# EAGLE board CT_schematic (EAGLE 7.6.0)

Size 100 x 80 mm. Coordinates in mm from the lower left corner, seen from the top.
Outline: 0,0 100,0 100,80 0,80 0,0
Copper layers (1*16): Top 0.035mm / dielectric 1.5mm / Bottom 0.035mm
Design rules "default": minimum track width 10mil, minimum drill 24mil, track to track 8mil, track to pad 8mil, pad to pad 8mil, via to via 8mil, smd to smd 8mil, copper to edge 40mil, drill to drill 8mil, minimum pad ring 10mil, minimum via ring 8mil, stop-mask expansion 4mil, vias tented up to drill 0mil, thermal gap 10mil

## Footprints (pad centres in the part's own frame; a part is rotated, then mirrored left to right if it is on the bottom)
C0603 = smd 0.8 x 0.8: 1 -0.762,0; 2 0.762,0
C0402 = smd 0.5 x 0.5: 1 -0.508,0; 2 0.508,0
C0805 = smd 1.2 x 1.3: 1 -1.016,0; 2 1.016,0
C1210 = smd 1.2 x 2.5: 1 -1.524,0; 2 1.524,0
C1206 = smd 1.3 x 1.6: 1 -1.524,0; 2 1.524,0
L0603 = smd 0.8 x 0.8: 1 -0.762,0; 2 0.762,0
DR1040 = smd 1.6 x 3.2: 1 -4.458,0; 2 4.458,0
L1210 = smd 1.2 x 2.5: 1 -1.524,0; 2 1.524,0
R0603 = smd 0.8 x 0.8: 1 -0.762,0; 2 0.762,0
LQFP144 = smd 0.35 x 1.35: 1 -8.75,-10.625; 2 -8.25,-10.625; 3 -7.75,-10.625; 4 -7.25,-10.625; 5 -6.75,-10.625; 6 -6.25,-10.625; 7 -5.75,-10.625; 8 -5.25,-10.625; 9 -4.75,-10.625; 10 -4.25,-10.625; 11 -3.75,-10.625; 12 -3.25,-10.625; 13 -2.75,-10.62; 14 -2.25,-10.625; 15 -1.75,-10.625; 16 -1.25,-10.625; 17 -0.75,-10.625; 18 -0.25,-10.625; 19 0.25,-10.625; 20 0.75,-10.625; 21 1.25,-10.625; 22 1.75,-10.625; 23 2.25,-10.625; 24 2.75,-10.62; 25 3.25,-10.625; 26 3.75,-10.625; 27 4.25,-10.625; 28 4.75,-10.625; 29 5.25,-10.625; 30 5.75,-10.625; 31 6.25,-10.625; 32 6.75,-10.625; 33 7.25,-10.625; 34 7.75,-10.625; 35 8.25,-10.625; 36 8.75,-10.625; 73 8.75,10.625; 74 8.25,10.625; 75 7.75,10.625; 76 7.25,10.625; 77 6.75,10.625; 78 6.25,10.625; 79 5.75,10.625; 80 5.25,10.625; 81 4.75,10.625; 82 4.25,10.625; 83 3.75,10.625; 84 3.25,10.625; 85 2.75,10.625; 86 2.25,10.625; 87 1.75,10.625; 88 1.25,10.625; 89 0.75,10.625; 90 0.25,10.625; 91 -0.25,10.625; 92 -0.75,10.625; 93 -1.25,10.625; 94 -1.75,10.625; 95 -2.25,10.625; 96 -2.75,10.625; 97 -3.25,10.625; 98 -3.75,10.625; 99 -4.25,10.625; 100 -4.75,10.625; 101 -5.25,10.625; 102 -5.75,10.625; 103 -6.25,10.625; 104 -6.75,10.625; 105 -7.25,10.625; 106 -7.75,10.625; 107 -8.25,10.625; 108 -8.75,10.625 | smd 1.35 x 0.35: 37 10.625,-8.75; 38 10.625,-8.25; 39 10.625,-7.75; 40 10.625,-7.25; 41 10.625,-6.75; 42 10.625,-6.25; 43 10.625,-5.75; 44 10.625,-5.25; 45 10.625,-4.75; 46 10.625,-4.25; 47 10.625,-3.75; 48 10.625,-3.25; 49 10.625,-2.75; 50 10.625,-2.25; 51 10.625,-1.75; 52 10.625,-1.25; 53 10.625,-0.75; 54 10.625,-0.25; 55 10.625,0.25; 56 10.625,0.75; 57 10.625,1.25; 58 10.625,1.75; 59 10.625,2.25; 60 10.625,2.75; 61 10.625,3.25; 62 10.625,3.75; 63 10.625,4.25; 64 10.625,4.75; 65 10.625,5.25; 66 10.625,5.75; 67 10.625,6.25; 68 10.625,6.75; 69 10.625,7.25; 70 10.625,7.75; 71 10.625,8.25; 72 10.625,8.75; 109 -10.625,8.75; 110 -10.625,8.25; 111 -10.625,7.75; 112 -10.625,7.25; 113 -10.625,6.75; 114 -10.625,6.25; 115 -10.625,5.75; 116 -10.625,5.25; 117 -10.625,4.75; 118 -10.625,4.25; 119 -10.625,3.75; 120 -10.625,3.25; 121 -10.625,2.75; 122 -10.625,2.25; 123 -10.625,1.75; 124 -10.625,1.25; 125 -10.625,0.75; 126 -10.625,0.25; 127 -10.625,-0.25; 128 -10.625,-0.75; 129 -10.625,-1.25; 130 -10.625,-1.75; 131 -10.625,-2.25; 132 -10.625,-2.75; 133 -10.625,-3.25; 134 -10.625,-3.75; 135 -10.625,-4.25; 136 -10.625,-4.75; 137 -10.625,-5.25; 138 -10.625,-5.75; 139 -10.625,-6.25; 140 -10.625,-6.75; 141 -10.625,-7.25; 142 -10.625,-7.75; 143 -10.625,-8.25; 144 -10.625,-8.75
10100565 = smd 0.8 x 2.35: 1 0,0; 2 1.25,0; 3 2.55,0; 4 4.25,0; 5 5.43,0; 6 6.68,0; 7 7.93,0; 8 9.18,0; 9 11.67,0; 10 14.18,0; 11 15.43,0; 12 16.68,0; 13 17.93,0; 14 19.18,0; 15 21.68,0 | smd 1.5 x 3.1: 16 23.495,-1.375; 20 25.685,-22.875 | smd 1.55 x 3.1: 17 -1.815,-1.375; 21 -1.815,-22.875 | drill 1.1 pad 1.1: 18 21.68,-2.375; 19 0.68,-2.375
SOIC-8 = smd 1.6 x 0.6: 1 -2.7,1.905 | smd 1.55 x 0.6: 2 -2.7,0.635; 3 -2.7,-0.635; 4 -2.7,-1.905; 5 2.7,-1.905; 6 2.7,-0.635; 7 2.7,0.635; 8 2.7,1.905
182-009-MALE = drill 1.194 pad 1.524 octagon: 1 -5.537,10.923; 2 -2.769,10.923; 3 0,10.923; 4 2.769,10.923; 5 5.537,10.923; 6 -4.153,8.08; 7 -1.384,8.08; 8 1.384,8.08; 9 4.153,8.08 | hole 3.048: -12.446,9.501; 12.446,9.501
SSOP-28 = smd 1.5 x 0.4: 1 -3.625,4.225; 2 -3.625,3.575; 3 -3.625,2.925; 4 -3.625,2.275; 5 -3.625,1.625; 6 -3.625,0.975; 7 -3.625,0.325; 8 -3.625,-0.325; 9 -3.625,-0.975; 10 -3.625,-1.625; 11 -3.625,-2.275; 12 -3.625,-2.925; 13 -3.625,-3.575; 14 -3.625,-4.225; 15 3.625,-4.225; 16 3.625,-3.575; 17 3.625,-2.925; 18 3.625,-2.275; 19 3.625,-1.625; 20 3.625,-0.975; 21 3.625,-0.325; 22 3.625,0.325; 23 3.625,0.975; 24 3.625,1.625; 25 3.625,2.275; 26 3.625,2.925; 27 3.625,3.575; 28 3.625,4.225
TH58NVG3S0HBAI4 = smd 0.46 x 0.46: A1 -5.6,2.4; A2 -5.6,1.6; A9 -5.6,-5.6; A10 -5.6,-6.4; B1 -4.8,2.4; B9 -4.8,-5.6; B10 -4.8,-6.4; C3 -4,0.8; C4 -3.2,0.8; C5 -2.4,0.8; C6 -1.6,0.8; C7 -0.8,0.8; C8 0,0.8; D3 -4,0; D4 -3.2,0; D5 -2.4,0; D6 -1.6,0; D7 -0.8,0; D8 0,0; E3 -4,-0.8; E4 -3.2,-0.8; E5 -2.4,-0.8; E6 -1.6,-0.8; E7 -0.8,-0.8; E8 0,-0.8; F3 -4,-1.6; F4 -3.2,-1.6; F5 -2.4,-1.6; F6 -1.6,-1.6; F7 -0.8,-1.6; F8 0,-1.6; G3 -4,-2.4; G4 -3.2,-2.4; G5 -2.4,-2.4; G6 -1.6,-2.4; G7 -0.8,-2.4; G8 0,-2.4; H3 -4,-3.2; H4 -3.2,-3.2; H5 -2.4,-3.2; H6 -1.6,-3.2; H7 -0.8,-3.2; H8 0,-3.2; J3 -4,-4; J4 -3.2,-4; J5 -2.4,-4; J6 -1.6,-4; J7 -0.8,-4; J8 0,-4; K3 -4,-4.8; K4 -3.2,-4.8; K5 -2.4,-4.8; K6 -1.6,-4.8; K7 -0.8,-4.8; K8 0,-4.8; L1 0.8,2.4; L2 0.8,1.6; L9 0.8,-5.6; L10 0.8,-6.4; M1 1.6,2.4; M2 1.6,1.6; M9 1.6,-5.6; M10 1.6,-6.4
FCI_10118193-0001LF = smd 0.4 x 1.35: 1 -1.3,2.675; 2 -0.65,2.675; 3 0,2.675; 4 0.65,2.675; 5 1.3,2.675 | smd 1.6 x 1.4: 6 -3.2,2.45; 7 3.2,2.45 | smd 1.9 x 1.9: 8 -1.2,0; 9 1.2,0 | hole 0.5: -3.3,0; 3.3,0
SOT143B = smd 1 x 0.7: 1 -0.75,-1 | smd 0.6 x 0.7: 2 0.95,-1; 3 0.95,1; 4 -0.95,1
ABLS-25.000MHZ-B2F-T = smd 5.6 x 2.8: 1 -3.81,0; 2 5.69,0
ASEK = smd 1.4 x 1: 1 -1.1,-0.8; 2 1.1,-0.8; 3 1.1,0.8; 4 -1.1,0.8
TSOT-23-5 = smd 1.3 x 0.62: 1 -1.31,0.95; 2 -1.31,0; 3 -1.31,-0.95; 4 1.31,-0.95; 5 1.31,0.95
DFN-8_DDB = smd 0.805 x 0.3: 1 -0.952,0.75; 2 -0.952,0.25; 3 -0.952,-0.25; 4 -0.952,-0.75; 5 0.952,-0.75; 6 0.952,-0.25; 7 0.952,0.25; 8 0.952,0.75 | smd 0.61 x 2.2: 9 0,0
DFN8_2X3MC = smd 0.813 x 0.305: 1 -1.398,0.75; 2 -1.398,0.25; 3 -1.398,-0.25; 4 -1.398,-0.75; 5 1.398,-0.75; 6 1.398,-0.25; 7 1.398,0.25; 8 1.398,0.75 | smd 1.753 x 1.549: 9 0,0
JST-2-SMD = smd 1 x 4.6: 1 -1,-3.7; 2 1,-3.7 | smd 1.6 x 3.4: NC1 -3.4,1.5; NC2 3.4,1.5
SON-6 = smd 0.55 x 0.3: 1 -0.355,0.5 | smd 0.52 x 0.3: 2 -0.37,0; 3 -0.37,-0.5; 4 0.37,-0.5; 5 0.37,0; 6 0.37,0.5
SW_4-1437565-2 = smd 1.4 x 2.1: 1 -2.23,4.55; 2 -2.23,-4.55; 3 2.23,4.55; 4 2.23,-4.55
LGM67K-G1J2-24-Z = smd 0.8 x 1.4: A -2,0; C 0,0
NC7SZ125M5X = smd 1.3 x 0.7: 1 -1.3,0.95; 2 -1.3,0; 3 -1.3,-0.95; 4 1.3,-0.95; 5 1.3,0.95

## Placement (x,y rotation side)
C1  1e-06  [C0603]  -78.74,90.17 0 top  (outside the outline)
C2  1e-07  [C0603]  -82.55,90.17 0 top  (outside the outline)
C3  1e-07  [C0603]  -86.36,90.17 0 top  (outside the outline)
C4  1e-07  [C0603]  -90.17,90.17 0 top  (outside the outline)
C5  1e-07  [C0603]  -15.24,95.25 0 top  (outside the outline)
C6  1e-07  [C0603]  -19.05,95.25 0 top  (outside the outline)
C7  1e-07  [C0603]  -22.86,95.25 0 top  (outside the outline)
C8  1e-07  [C0603]  -26.67,95.25 0 top  (outside the outline)
C9  1e-07  [C0603]  -30.48,95.25 0 top  (outside the outline)
C10  1e-07  [C0603]  -34.29,95.25 0 top  (outside the outline)
C11  1e-07  [C0603]  -38.1,95.25 0 top  (outside the outline)
C12  1e-07  [C0603]  -41.91,95.25 0 top  (outside the outline)
C13  1e-07  [C0603]  -45.72,95.25 0 top  (outside the outline)
C14  4.7e-06  [C0603]  -59.69,90.17 0 top  (outside the outline)
C15  2.2e-06  [C0603]  -63.5,90.17 0 top  (outside the outline)
C16  2.2e-06  [C0603]  -67.31,90.17 0 top  (outside the outline)
C17  1e-08  [C0603]  -49.53,95.25 0 top  (outside the outline)
C18  1e-06  [C0603]  -53.34,95.25 0 top  (outside the outline)
C19  1e-11  [C0402]  -91.44,95.25 0 top  (outside the outline)
C20  1e-11  [C0402]  -15.24,100.33 0 top  (outside the outline)
C21  1e-06  [C0603]  -57.15,95.25 0 top  (outside the outline)
C22  1e-07  [C0402]  -19.05,100.33 0 top  (outside the outline)
C23  1e-05  [C0805]  -46.99,80.01 0 top  (outside the outline)
C24  1e-06  [C0603]  -60.96,95.25 0 top  (outside the outline)
C25  1e-06  [C0603]  -64.77,95.25 0 top  (outside the outline)
C26  1e-07  [C0402]  -22.86,100.33 0 top  (outside the outline)
C27  1e-07  [C0402]  -26.67,100.33 0 top  (outside the outline)
C28  1e-07  [C0402]  -30.48,100.33 0 top  (outside the outline)
C29  1e-07  [C0402]  -34.29,100.33 0 top  (outside the outline)
C30  1e-07  [C0402]  -38.1,100.33 0 top  (outside the outline)
C31  1e-05  [C0805]  -52.07,80.01 0 top  (outside the outline)
C32  1e-07  [C0402]  -41.91,100.33 0 top  (outside the outline)
C33  1e-07  [C0402]  -45.72,100.33 0 top  (outside the outline)
C34  1e-08  [C0402]  -49.53,100.33 0 top  (outside the outline)
C35  1e-05  [C0805]  -57.15,80.01 0 top  (outside the outline)
C36  1e-05  [C0805]  -62.23,80.01 0 top  (outside the outline)
C37  1e-05  [C1210]  -16.51,80.01 0 top  (outside the outline)
C38  2.2e-06  [C0603]  -71.12,90.17 0 top  (outside the outline)
C39  2.2e-07  [C0603]  -74.93,90.17 0 top  (outside the outline)
C40  1e-07  [C0402]  -53.34,100.33 0 top  (outside the outline)
C41  1e-05  [C1206]  -29.21,80.01 0 top  (outside the outline)
C42  1e-05  [C1206]  -35.56,80.01 0 top  (outside the outline)
C43  1e-08  [C0402]  -57.15,100.33 0 top  (outside the outline)
F1  240.0  [L0603]  -68.58,95.25 0 top  (outside the outline)
I1  2.5e-06  [DR1040]  -67.31,57.15 0 top  (outside the outline)
I2  1e-05  [L1210]  -22.86,80.01 0 top  (outside the outline)
R2  1000.0  [R0603]  -72.39,95.25 0 top  (outside the outline)
R4  4700.0  [R0603]  -76.2,95.25 0 top  (outside the outline)
R5  10000.0  [R0603]  -86.36,85.09 0 top  (outside the outline)
R6  10000.0  [R0603]  -91.44,85.09 0 top  (outside the outline)
R7  10000.0  [R0603]  -15.24,90.17 0 top  (outside the outline)
R8  100000.0  [R0603]  -80.01,80.01 0 top  (outside the outline)
R9  100000.0  [R0603]  -85.09,80.01 0 top  (outside the outline)
R10  100000.0  [R0603]  -90.17,80.01 0 top  (outside the outline)
R11  100000.0  [R0603]  -15.24,85.09 0 top  (outside the outline)
R12  100000.0  [R0603]  -20.32,85.09 0 top  (outside the outline)
R13  100000.0  [R0603]  -25.4,85.09 0 top  (outside the outline)
R14  100000.0  [R0603]  -30.48,85.09 0 top  (outside the outline)
R15  100000.0  [R0603]  -35.56,85.09 0 top  (outside the outline)
R16  100000.0  [R0603]  -40.64,85.09 0 top  (outside the outline)
R17  100000.0  [R0603]  -45.72,85.09 0 top  (outside the outline)
R18  100000.0  [R0603]  -50.8,85.09 0 top  (outside the outline)
R19  120.0  [R0603]  -80.01,95.25 0 top  (outside the outline)
R20  100000.0  [R0603]  -55.88,85.09 0 top  (outside the outline)
R21  10000.0  [R0603]  -20.32,90.17 0 top  (outside the outline)
R22  10000.0  [R0603]  -25.4,90.17 0 top  (outside the outline)
R23  10000.0  [R0603]  -30.48,90.17 0 top  (outside the outline)
R24  10000.0  [R0603]  -35.56,90.17 0 top  (outside the outline)
R25  10000.0  [R0603]  -40.64,90.17 0 top  (outside the outline)
R26  220000.0  [R0603]  -60.96,85.09 0 top  (outside the outline)
R27  1000000.0  [R0603]  -74.93,80.01 0 top  (outside the outline)
R28  100000.0  [R0603]  -66.04,85.09 0 top  (outside the outline)
R29  560000.0  [R0603]  -71.12,85.09 0 top  (outside the outline)
R30  10000.0  [R0603]  -45.72,90.17 0 top  (outside the outline)
R31  10000.0  [R0603]  -50.8,90.17 0 top  (outside the outline)
R32  9100.0  [R0603]  -83.82,95.25 0 top  (outside the outline)
R33  680000.0  [R0603]  -76.2,85.09 0 top  (outside the outline)
R34  120000.0  [R0603]  -81.28,85.09 0 top  (outside the outline)
R35  2000.0  [R0603]  -87.63,95.25 0 top  (outside the outline)
R36  10000.0  [R0603]  -55.88,90.17 0 top  (outside the outline)
U1  STM32F427ZIT7  [LQFP144]  -55.88,11.43 0 top  (outside the outline)
U2  10100565  [10100565]  -40.64,25.4 0 top  (outside the outline)
U3  MCP2562-E/SN  [SOIC-8]  -21.59,72.39 0 top  (outside the outline)
U4  182-009-113R531  [182-009-MALE]  -36.83,35.56 0 top  (outside the outline)
U5  ST3241EBPR  [SSOP-28]  -19.05,59.69 0 top  (outside the outline)
U6  182-009-113R531  [182-009-MALE]  -76.2,35.56 0 top  (outside the outline)
U7  TH58NVG3S0HBAI4  [TH58NVG3S0HBAI4]  -35.56,60.96 0 top  (outside the outline)
U8  10118193-0001LF  [FCI_10118193-0001LF]  -31.75,71.12 0 top  (outside the outline)
U9  prtr5v0u2ax  [SOT143B]  -76.2,100.33 0 top  (outside the outline)
U10  ABLS-25.000MHZ-B2F-T  [ABLS-25.000MHZ-B2F-T]  -69.85,71.12 0 top  (outside the outline)
U11  ASEK-32.768KHz-ECST  [ASEK]  -53.34,71.12 0 top  (outside the outline)
U12  ltc3406es5  [TSOT-23-5]  -67.31,78.74 0 top  (outside the outline)
U13  LT3494AEDDB#TRMPBF  [DFN-8_DDB]  -60.96,100.33 0 top  (outside the outline)
U14  MCP73831T-2ACI/MC  [DFN8_2X3MC]  -86.36,99.06 0 top  (outside the outline)
U15  S2B-PH-SM4-TB(LF)(SN)  [JST-2-SMD]  -82.55,58.42 0 top  (outside the outline)
U16  TPS3895ADRYR  [SON-6]  -80.01,99.06 0 top  (outside the outline)
U17  4-1437565-2  [SW_4-1437565-2]  -57.15,57.15 0 top  (outside the outline)
U18  Q65110A2395  [LGM67K-G1J2-24-Z]  -81.28,71.12 0 top  (outside the outline)
U19  nc7sz125m5x  [NC7SZ125M5X]  -40.64,78.74 0 top  (outside the outline)

## Library data of the parts
C1-C43 F1 I1 I2 R2 R4-R36 U1-U19 = circuit_tree

## Nets
CLK_CRYSTAL_U1_23: C19.1 U1.23 U10.1
CLK_CRYSTAL_U1_24: C20.1 U1.24 U10.2
CLK_U1_8: U1.8 U11.3
GND: C1.2 C2.2 C3.2 C4.2 C5.2 C6.2 C7.2 C8.2 C9.2 C10.2 C11.2 C12.2 C13.2 C14.2 C15.2 C16.2 C17.2 C18.2 C19.2 C20.2 C21.2 C22.2 C23.2 C24.2 C25.2 C26.2 C29.2 C30.2 C31.2 C32.2 C33.2 C34.2 C35.2 C36.1 C36.2 C37.2 C38.2 C39.2 C40.2 C41.2 C42.2 C43.2 R2.2 R7.2 R26.2 R32.2 R34.2 R35.2 U1.16 U1.31 U1.38 U1.51 U1.61 U1.83 U1.94 U1.103 U1.107 U1.120 U1.130 U2.6 U2.10 U2.12 U2.16 U2.17 U2.20 U2.21 U3.2 U3.8 U4.5 U5.23 U5.25 U6.5 U7.C5 U7.K3 U7.K8 U8.5 U8.6 U8.7 U8.8 U8.9 U9.1 U11.2 U12.2 U13.2 U13.9 U14.6 U14.9 U15.2 U16.2 U18.C U19.1 U19.3
INPUT_USBPOWER_5V: C21.1 C41.1 R36.2 U1.101 U8.1 U9.4 U14.1 U14.2
NET_U1_25: R4.1 U1.25 U19.4
NET_U1_33: C17.1 C18.1 F1.1 U1.32 U1.33
NET_U1_48: R7.1 U1.48
NET_U1_71: C15.1 U1.71
NET_U1_106: C16.1 U1.106
NET_U1_138: R6.1 U1.138
NET_U1_141: U18.A
NET_U1_142: U17.3 U17.4
NET_U1_143: R5.1 U1.143
NET_U2_1: R10.1 U2.1
NET_U2_2: R9.1 U2.2
NET_U2_18: U2.18 U2.19
NET_U3_6: R19.2 U3.6
NET_U4_2: R19.2 U3.6 U4.2
NET_U4_3: R19.1 U3.7 U4.3
NET_U5_1: C28.1 U5.1
NET_U5_2: C28.2 U5.2
NET_U5_3: C30.1 U5.3
NET_U5_22: R20.1 U5.22
NET_U5_24: C27.2 U5.24
NET_U5_27: C29.1 U5.27
NET_U5_28: C27.1 U5.28
NET_U6_2: U5.4 U6.2
NET_U6_3: U5.9 U6.3
NET_U6_7: U5.5 U6.7
NET_U6_8: U5.10 U6.8
NET_U7_C3: R24.1 U7.C3
NET_U12_1: U12.1
NET_U12_3: I1.1 U12.3
NET_U12_5: R26.1 R27.1 U12.5
NET_U12_ATNET_3: I1.2 R27.2
NET_U13_1: I2.1 U13.1
NET_U13_5: R28.1 U13.5
NET_U13_6: R29.1 U13.6
NET_U13_8: C39.1 U13.8
NET_U14_5: R36.1 U14.5
NET_U14_8: R35.1 U14.8
NET_U16_1: R31.1 R32.1 U16.1
NET_U16_3: R33.2 R34.1 U16.3
NET_U16_4: R30.1 U16.4 U19.2
NET_U17_1: R2.1 U17.1 U17.2
PROC_CAN2_RX: U1.73 U3.4
PROC_CAN2_TX: U1.74 U3.1
PROC_FMC_A16: U1.80 U7.D5
PROC_FMC_A17: U1.81 U7.C4
PROC_FMC_D0: U1.85 U7.H4
PROC_FMC_D1: U1.86 U7.J4
PROC_FMC_D2: U1.114 U7.K4
PROC_FMC_D3: U1.115 U7.K5
PROC_FMC_D4: U1.58 U7.K6
PROC_FMC_D5: U1.59 U7.J7
PROC_FMC_D6: U1.60 U7.K7
PROC_FMC_D7: U1.63 U7.J8
PROC_FMC_INT2: R25.1 U1.91 U7.C8
PROC_FMC_NCE2: R21.1 U1.123 U7.C6
PROC_FMC_NOE: R22.1 U1.118 U7.D4
PROC_FMC_NWE: R23.1 U1.119 U7.C7
PROC_SDIO_CK: R8.1 U1.113 U2.8
PROC_SDIO_D0: R11.1 U1.98 U2.4
PROC_SDIO_D1: R12.1 U1.99 U2.3
PROC_SDIO_D2: R13.1 U1.111 U2.15
PROC_SDIO_D3: R14.1 U1.112 U2.14
PROC_SDIO_D4: R15.1 U1.139 U2.13
PROC_SDIO_D5: R16.1 U1.140 U2.11
PROC_SDIO_D6: R17.1 U1.96 U2.7
PROC_SDIO_D7: R18.1 U1.97 U2.5
PROC_UART4_RX: U1.35 U5.19
PROC_UART4_TX: U1.34 U5.14
PROC_USB_OTG_FS_DM: U1.103 U8.2 U9.3
PROC_USB_OTG_FS_DP: U1.104 U8.3 U9.2
VCC_S1_3V7: C35.1 C37.1 C42.1 I2.2 R28.2 U12.4 U13.3 U13.4 U14.3 U14.4 U15.1
VCC_TIER1_3V3: C1.1 C2.1 C3.1 C4.1 C5.1 C6.1 C7.1 C8.1 C9.1 C10.1 C11.1 C12.1 C13.1 C14.1 C22.1 C23.1 C25.1 C26.1 C31.1 C32.1 C33.1 C34.1 C36.2 C40.1 C43.1 F1.2 I1.2 R4.2 R5.2 R6.2 R8.2 R9.2 R10.2 R11.2 R12.2 R13.2 R14.2 R15.2 R16.2 R17.2 R18.2 R20.2 R21.2 R22.2 R23.2 R24.2 R25.2 R27.2 R30.2 R31.2 R33.1 U1.6 U1.17 U1.30 U1.39 U1.52 U1.62 U1.72 U1.84 U1.95 U1.108 U1.121 U1.131 U1.144 U2.9 U3.5 U5.26 U7.H8 U7.J6 U11.4 U16.6 U19.5
VCC_TIER1_5V0: C24.1 C38.1 R29.2 U3.3 U13.7

## Tracks (layer width: path | path; a pad name or v marks a point on that pad's centre or on a via)
CLK_CRYSTAL_U1_23  (2 unrouted)
CLK_CRYSTAL_U1_24  (2 unrouted)
CLK_U1_8  (1 unrouted)
GND  (91 unrouted)
INPUT_USBPOWER_5V  (7 unrouted)
NET_U1_25  (2 unrouted)
NET_U1_33  (4 unrouted)
NET_U1_48  (1 unrouted)
NET_U1_71  (1 unrouted)
NET_U1_106  (1 unrouted)
NET_U1_138  (1 unrouted)
NET_U1_142  (1 unrouted)
NET_U1_143  (1 unrouted)
NET_U2_1  (1 unrouted)
NET_U2_2  (1 unrouted)
NET_U2_18  (1 unrouted)
NET_U3_6  (1 unrouted)
NET_U4_2  (2 unrouted)
NET_U4_3  (2 unrouted)
NET_U5_1  (1 unrouted)
NET_U5_2  (1 unrouted)
NET_U5_3  (1 unrouted)
NET_U5_22  (1 unrouted)
NET_U5_24  (1 unrouted)
NET_U5_27  (1 unrouted)
NET_U5_28  (1 unrouted)
NET_U6_2  (1 unrouted)
NET_U6_3  (1 unrouted)
NET_U6_7  (1 unrouted)
NET_U6_8  (1 unrouted)
NET_U7_C3  (1 unrouted)
NET_U12_3  (1 unrouted)
NET_U12_5  (2 unrouted)
NET_U12_ATNET_3  (1 unrouted)
NET_U13_1  (1 unrouted)
NET_U13_5  (1 unrouted)
NET_U13_6  (1 unrouted)
NET_U13_8  (1 unrouted)
NET_U14_5  (1 unrouted)
NET_U14_8  (1 unrouted)
NET_U16_1  (2 unrouted)
NET_U16_3  (2 unrouted)
NET_U16_4  (2 unrouted)
NET_U17_1  (2 unrouted)
PROC_CAN2_RX  (1 unrouted)
PROC_CAN2_TX  (1 unrouted)
PROC_FMC_A16  (1 unrouted)
PROC_FMC_A17  (1 unrouted)
PROC_FMC_D0  (1 unrouted)
PROC_FMC_D1  (1 unrouted)
PROC_FMC_D2  (1 unrouted)
PROC_FMC_D3  (1 unrouted)
PROC_FMC_D4  (1 unrouted)
PROC_FMC_D5  (1 unrouted)
PROC_FMC_D6  (1 unrouted)
PROC_FMC_D7  (1 unrouted)
PROC_FMC_INT2  (2 unrouted)
PROC_FMC_NCE2  (2 unrouted)
PROC_FMC_NOE  (2 unrouted)
PROC_FMC_NWE  (2 unrouted)
PROC_SDIO_CK  (2 unrouted)
PROC_SDIO_D0  (2 unrouted)
PROC_SDIO_D1  (2 unrouted)
PROC_SDIO_D2  (2 unrouted)
PROC_SDIO_D3  (2 unrouted)
PROC_SDIO_D4  (2 unrouted)
PROC_SDIO_D5  (2 unrouted)
PROC_SDIO_D6  (2 unrouted)
PROC_SDIO_D7  (2 unrouted)
PROC_UART4_RX  (1 unrouted)
PROC_UART4_TX  (1 unrouted)
PROC_USB_OTG_FS_DM  (2 unrouted)
PROC_USB_OTG_FS_DP  (2 unrouted)
VCC_S1_3V7  (10 unrouted)
VCC_TIER1_3V3  (71 unrouted)
VCC_TIER1_5V0  (4 unrouted)